# EAGLE board blinkm_battir2a (EAGLE 5.07)
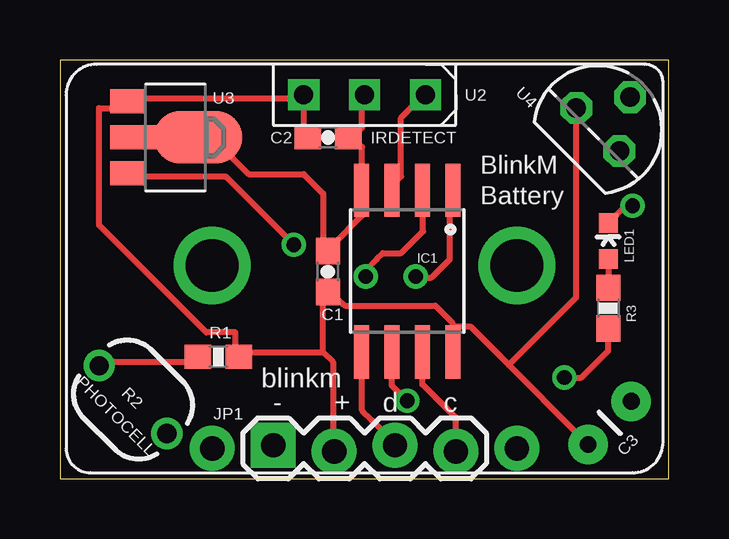
[diagram p0: board, top side]
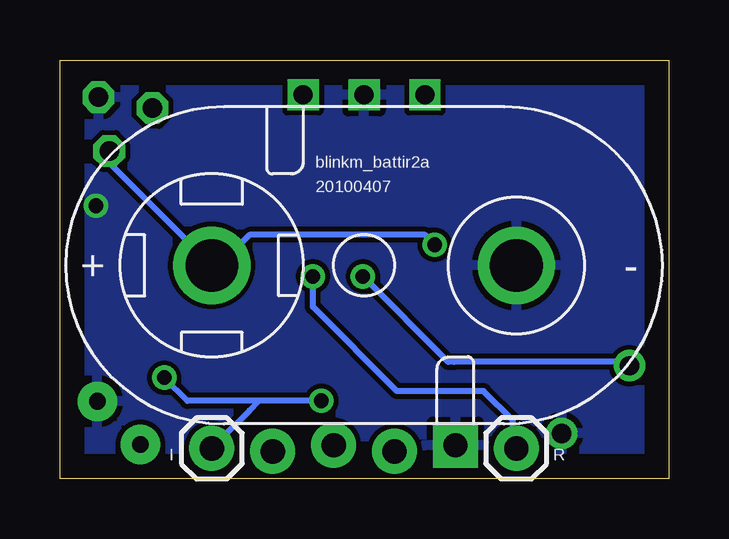
[diagram p1: board, bottom side, seen from below]

Size 25.38 x 17.45 mm. Coordinates in mm from the lower left corner, seen from the top.
Outline: 0,0 25.38,0 25.38,17.45 0,17.45 0,0
Copper layers (1*16): Top 0.035mm / dielectric 1.5mm / Bottom 0.035mm
Design rules "default": minimum track width 10mil, minimum drill 24mil, track to track 8mil, track to pad 8mil, pad to pad 8mil, via to via 8mil, smd to smd 8mil, copper to edge 40mil, drill to drill 8mil, minimum pad ring 10mil, minimum via ring 8mil, stop-mask expansion 4mil, vias tented up to drill 0mil, thermal gap 10mil

## Footprints (pad centres in the part's own frame; a part is rotated, then mirrored left to right if it is on the bottom)
KEYSTONE_968_9V_VERT = drill 2.2 round: + 6.35,0; - -6.35,0
0603-CAP = smd 1.1 x 1: 1 -0.85,0; 2 0.85,0
CAP-PTH-SMALL = drill 0.7 pad 1.651 round: 1 0,0; 2 2.54,0
1X01 = drill 1.016 pad 1.88 round: 1 0,0
SO08-EIAJ = smd 0.61 x 2.21: 1 -1.905,-3.378; 2 -0.635,-3.378; 3 0.635,-3.378; 4 1.905,-3.378; 5 1.905,3.353; 6 0.635,3.353; 7 -0.635,3.353; 8 -1.905,3.353
1X04_LOCK = drill 1.016 pad 1.88 square: 1 0,0.127 | drill 1.016 pad 1.88 round: 2 2.54,-0.127; 3 5.08,0.127; 4 7.62,-0.127
LED-0603 = smd 0.8 x 0.8: A 0,-0.75; C 0,0.75
0603-RES = smd 1.1 x 1: 1 -0.85,0; 2 0.85,0
PHOTOCELL = drill 0.8 round: 1 -2,0; 2 2,0
3PIN-2.54MM = drill 0.8 square: 1 -2.54,0; 2 0,0; 3 2.54,0
SOT89 = smd 1 x 1.5: 1 -1.499,-1.981; 3 1.499,-1.981 | smd 1 x 2: 2 0,-1.727 | smd 2.2 x 3.7: 2@1 0,0.94
TO92 = drill 0.813 octagon: 1 -1.27,0; 2 0,1.905; 3 1.27,0

## Placement (x,y rotation side)
B1  BATTERY_9V  [KEYSTONE_968_9V_VERT]  12.7,8.89 180 bottom
C1  100n  [0603-CAP]  11.18,8.64 90 top
C2  100n  [0603-CAP]  11.18,14.22 0 top
C3  [CAP-PTH-SMALL]  22.02,1.43 45 top
I  M01PTH  [1X01]  19.05,1.27 0 bottom
IC1  ATTINY45SOIC  [SO08-EIAJ]  14.48,8.64 180 top
JP1  blinkm  [1X04_LOCK]  8.89,1.27 0 top
LED1  [LED-0603]  22.86,9.91 0 top
R  M01PTH  [1X01]  6.35,1.27 0 bottom
R1  [0603-RES]  6.6,5.08 0 top
R2  PHOTOCELLPTH  [PHOTOCELL]  3.05,3.3 135 top
R3  [0603-RES]  22.86,7.11 270 top
U2  IRDETECTOR  [3PIN-2.54MM]  12.7,16 180 top
U3  78L05F  [SOT89]  4.83,14.22 270 top
U4  7805L  [TO92]  22.43,14.55 315 top

## Library data of the parts
B1 IC1 U2 = todstuff
C1-C3 I JP1 LED1 R R1-R3 = SparkFun-20091103
U3 U4 = linear

## Nets
9V: B1.+ U3.3 U4.3
GND: B1.- C1.2 C2.2 C3.2 IC1.4 JP1.1 LED1.C R2.1 U2.2 U3.2 U3.2@1 U4.2
IRDETECT: IC1.3 U2.1
MISO: I.1 IC1.6 R3.2
N$1: LED1.A R3.1
PB3: IC1.2 R1.1 R2.2
RESET: IC1.1 R.1
SCL: IC1.7 JP1.4
SDA: IC1.5 JP1.3
VCC: C1.1 C2.1 C3.1 IC1.8 JP1.2 R1.2 U2.3 U3.1 U4.1

## Tracks (layer width: path | path; a pad name or v marks a point on that pad's centre or on a via)
9V  (via drill 0.61)
  Top 0.254: v9.75,9.75 6.91,12.6 3.25,12.6 U3.3
  Bottom 0.254: v9.75,9.75 10.16,10.16 17.48,10.16 18.69,8.94 B1.+ 23.32,13.16 U4.3
GND  (via drill 0.61)
  Top 0.254: 12.19,14.22 12.6,14.63 12.6,15.85 U2.2 | 12.19,14.22 C2.2 12.19,14.22 | 12.19,14.22 12.6,13.82 12.6,12.19 IC1.4 12.6,11.79 12.6,10.97 11.38,9.75 C1.2 10.97,9.75 10.97,11.89 10.16,12.7 7.87,12.7 6.35,14.22 | U3.2 3.25,14.22 5.69,14.22 U3.2@1 6.1,14.22 6.35,14.22 | 6.35,14.22 6.5,14.22 | LED1.C 23.58,11.38 v23.88,11.38
  pour Bottom: 0,17.78 27.94,17.78 27.94,-1.27 0,-1.27
IRDETECT
  Top 0.254: IC1.3 13.82,12.19 14.22,12.6 14.22,15.04 15.04,15.85 U2.1
MISO  (via drill 0.61)
  Top 0.254: IC1.6 13.84,3.89 v14.48,3.25 | 22.81,6.21 R3.2 22.86,5.33 21.74,4.22 v21.03,4.22
  Bottom 0.254: v14.48,3.25 17.07,3.25 | 17.07,3.25 17.48,2.85 18.69,1.63 I.1 | v21.03,4.22 20.07,3.25 17.07,3.25
N$1
  Top 0.254: LED1.A R3.1
PB3  (via drill 0.61)
  Top 0.254: R1.1 5.69,4.88 2.03,4.88 R2.2 | IC1.2 15.11,11.4 15.14,11.38 15.14,10.31 14.22,9.4 13.46,9.4 13.21,9.14 12.75,8.69 v12.75,8.43
  Bottom 0.254: R2.2 2.03,4.88 8.94,4.88 9.2,4.88 v12.75,8.43
RESET  (via drill 0.61)
  Top 0.254: IC1.1 16.26,11.79 16.26,9.14 15.49,8.38 14.88,8.38 v14.83,8.43
  Bottom 0.254: R.1 6.5,1.63 6.5,2.44 7.72,3.66 11.33,3.66 14.83,7.16 v14.83,8.43
SCL
  Top 0.254: IC1.7 15.11,3.94 16.51,2.54 JP1.4
SDA
  Top 0.254: IC1.5 12.6,5.28 12.6,2.85 13.01,2.44 13.82,1.63 JP1.3
VCC
  Top 0.254: 10.16,15.85 10.16,14.22 C2.1 | 10.16,15.85 U2.3 10.16,15.85 | 10.16,15.85 3.25,15.85 U3.1 2.85,15.44 1.63,15.44 1.63,10.57 6.1,6.1 7.32,6.1 7.32,5.28 R1.2 7.72,5.28 10.97,5.28 | 10.97,5.28 10.97,7.72 C1.1 11.89,7.21 15.65,7.21 16.36,6.5 16.36,6.35 | 10.97,5.28 11.38,4.88 11.38,1.22 JP1.2 | 16.36,6.35 16.36,5.69 16.26,5.28 IC1.8 | C3.1 21.53,1.93 18.71,4.74 | 18.71,4.74 17.11,6.35 16.36,6.35 | U4.1 21.53,7.56 18.71,4.74

## Text on the board
tPlace: IRDETECT | BlinkM | Battery | blinkm | - | + | d | c | PHOTOCELL
bPlace: blinkm_battir2a | 20100407